# EAGLE board LED Driver (EAGLE 9.1.3)

Size 42 x 28 mm. Coordinates in mm from the lower left corner, seen from the top.
Outline: 0,28 0,0 42,0 42,28 0,28
Outline: circle at 2.54,25.4 radius 1.27
Outline: circle at 2.54,2.54 radius 1.27
Outline: circle at 39.37,2.54 radius 1.27
Outline: circle at 39.37,25.4 radius 1.27
Copper layers (1*16): Top 0.035mm / dielectric 1.5mm / Bottom 0.035mm
Design rules "default": minimum track width 6mil, minimum drill 0.35mm, track to track 6mil, track to pad 6mil, pad to pad 6mil, via to via 6mil, smd to smd 6mil, copper to edge 40mil, drill to drill 6mil, minimum pad ring 10mil, minimum via ring 8mil, stop-mask expansion 4mil, vias tented up to drill 0mil, thermal gap 10mil

## Footprints (pad centres in the part's own frame; a part is rotated, then mirrored left to right if it is on the bottom)
SCREWTERMINAL-3.5MM-4 = drill 1.2 pad 2.032 square: 1 0,0 | drill 1.2 pad 2.032: 2 3.5,0; 3 7,0; 4 10.5,0
SCREWTERMINAL-3.5MM-2 = drill 1.2 pad 2.032 square: 1 0,0 | drill 1.2 pad 2.032: 2 3.5,0
JST-4-PTH = drill 0.7 pad 1.6: 1 -3,0; 2 -1,0; 3 1,0; 4 3,0
DPAK = smd 1.6 x 3: 1 -2.28,-5.31; 3 2.28,-5.31 | smd 4.826 x 5.715: 4 0,1.588
VFSOP-8 = smd 0.25 x 0.65: P$1 -0.75,-1.45; P$2 -0.25,-1.45; P$3 0.25,-1.45; P$4 0.75,-1.45; P$5 0.75,1.45; P$6 0.25,1.45; P$7 -0.25,1.45; P$8 -0.75,1.45

## Placement (x,y rotation side)
J1  [SCREWTERMINAL-3.5MM-4]  38.1,8.89 90 top
J2  [SCREWTERMINAL-3.5MM-2]  3.81,16.51 270 top
J3  [JST-4-PTH]  11.43,21.59 0 top
J4  [JST-4-PTH]  11.43,6.35 180 top
Q1  35A/25V/8.5mΩ  [DPAK]  26.67,5.08 270 top
Q2  35A/25V/8.5mΩ  [DPAK]  26.67,13.97 270 top
Q3  35A/25V/8.5mΩ  [DPAK]  26.67,22.86 270 top
U1  [VFSOP-8]  11.43,13.97 0 top

## Library data of the parts
J1 = SparkFun-Connectors; PROD_ID: 2xCONN-08399; SF_ID: 2xPRT-08084
J2 = SparkFun-Connectors; PROD_ID: CONN-08399
J3 J4 = SparkFun-Connectors; PROD_ID: WIRE-13531; SF_ID: PRT-09916
Q1-Q3 = SparkFun-DiscreteSemi; PROD_ID: TRANS-09984
U1 = adafruit

## Nets
N$1: J2.2 Q1.4 Q2.4 Q3.4
N$2: J1.2 Q1.3
N$3: J1.3 Q2.3
N$4: J1.4 Q3.3
N$5: J1.1 J2.1
N$6: J3.1 U1.P$3
N$7: J3.2 U1.P$5
N$8: J3.4 U1.P$7

## Tracks (layer width: path | path; a pad name or v marks a point on that pad's centre or on a via)
N$1  (3 unrouted)
N$2  (1 unrouted)
N$3  (1 unrouted)
N$4  (1 unrouted)
N$5  (1 unrouted)
N$6  (1 unrouted)
N$7  (1 unrouted)
N$8  (1 unrouted)